# Altium PCB FlightController.PcbDoc
Units mil, origin at the board's own origin, x right, y up, seen from the top; angles counter-clockwise.
Board outline 3138.03 x 2448.03 mil, 2 copper layers (Top Layer, Bottom Layer); 37 components, 47 nets, 187 pads, 24 vias.
Unrouted connection lines stored in the file: 2.
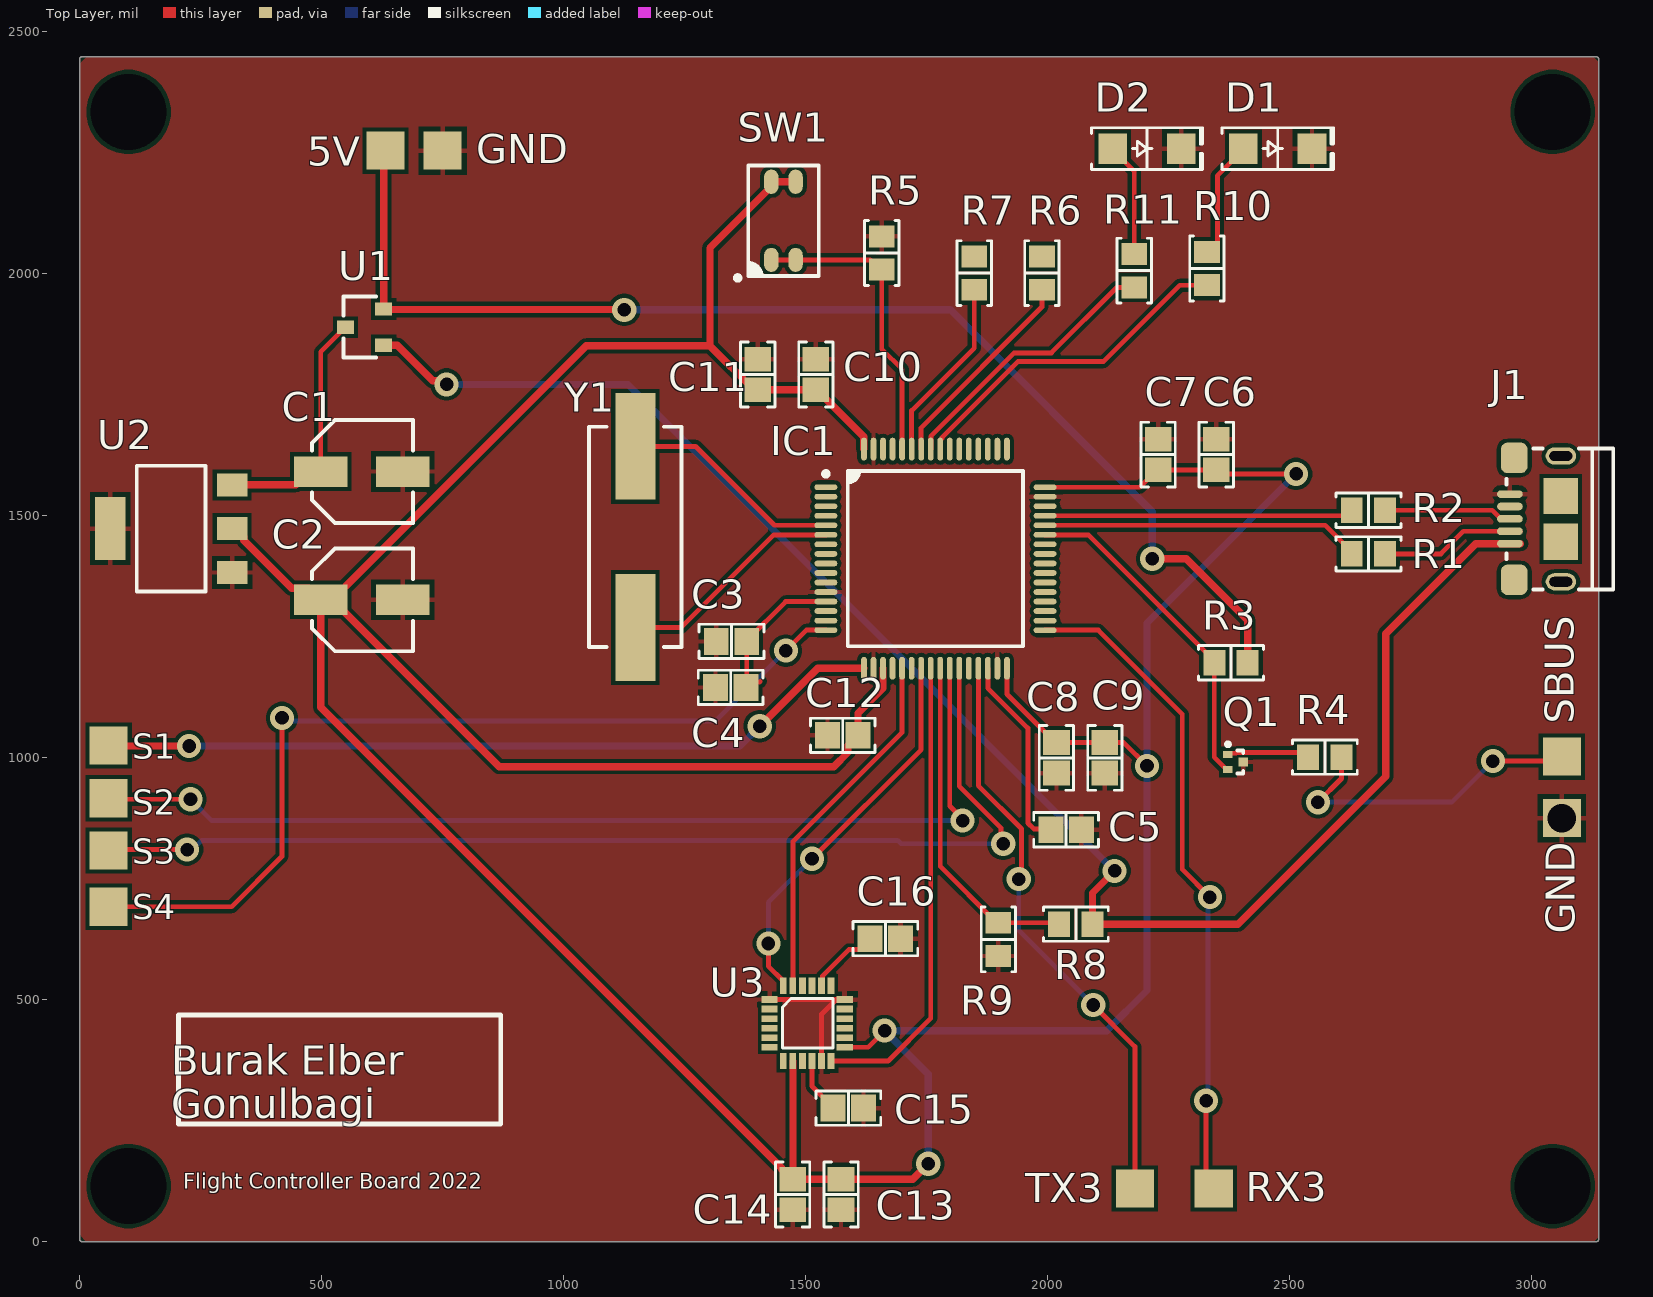
[diagram p0: Top Layer view]
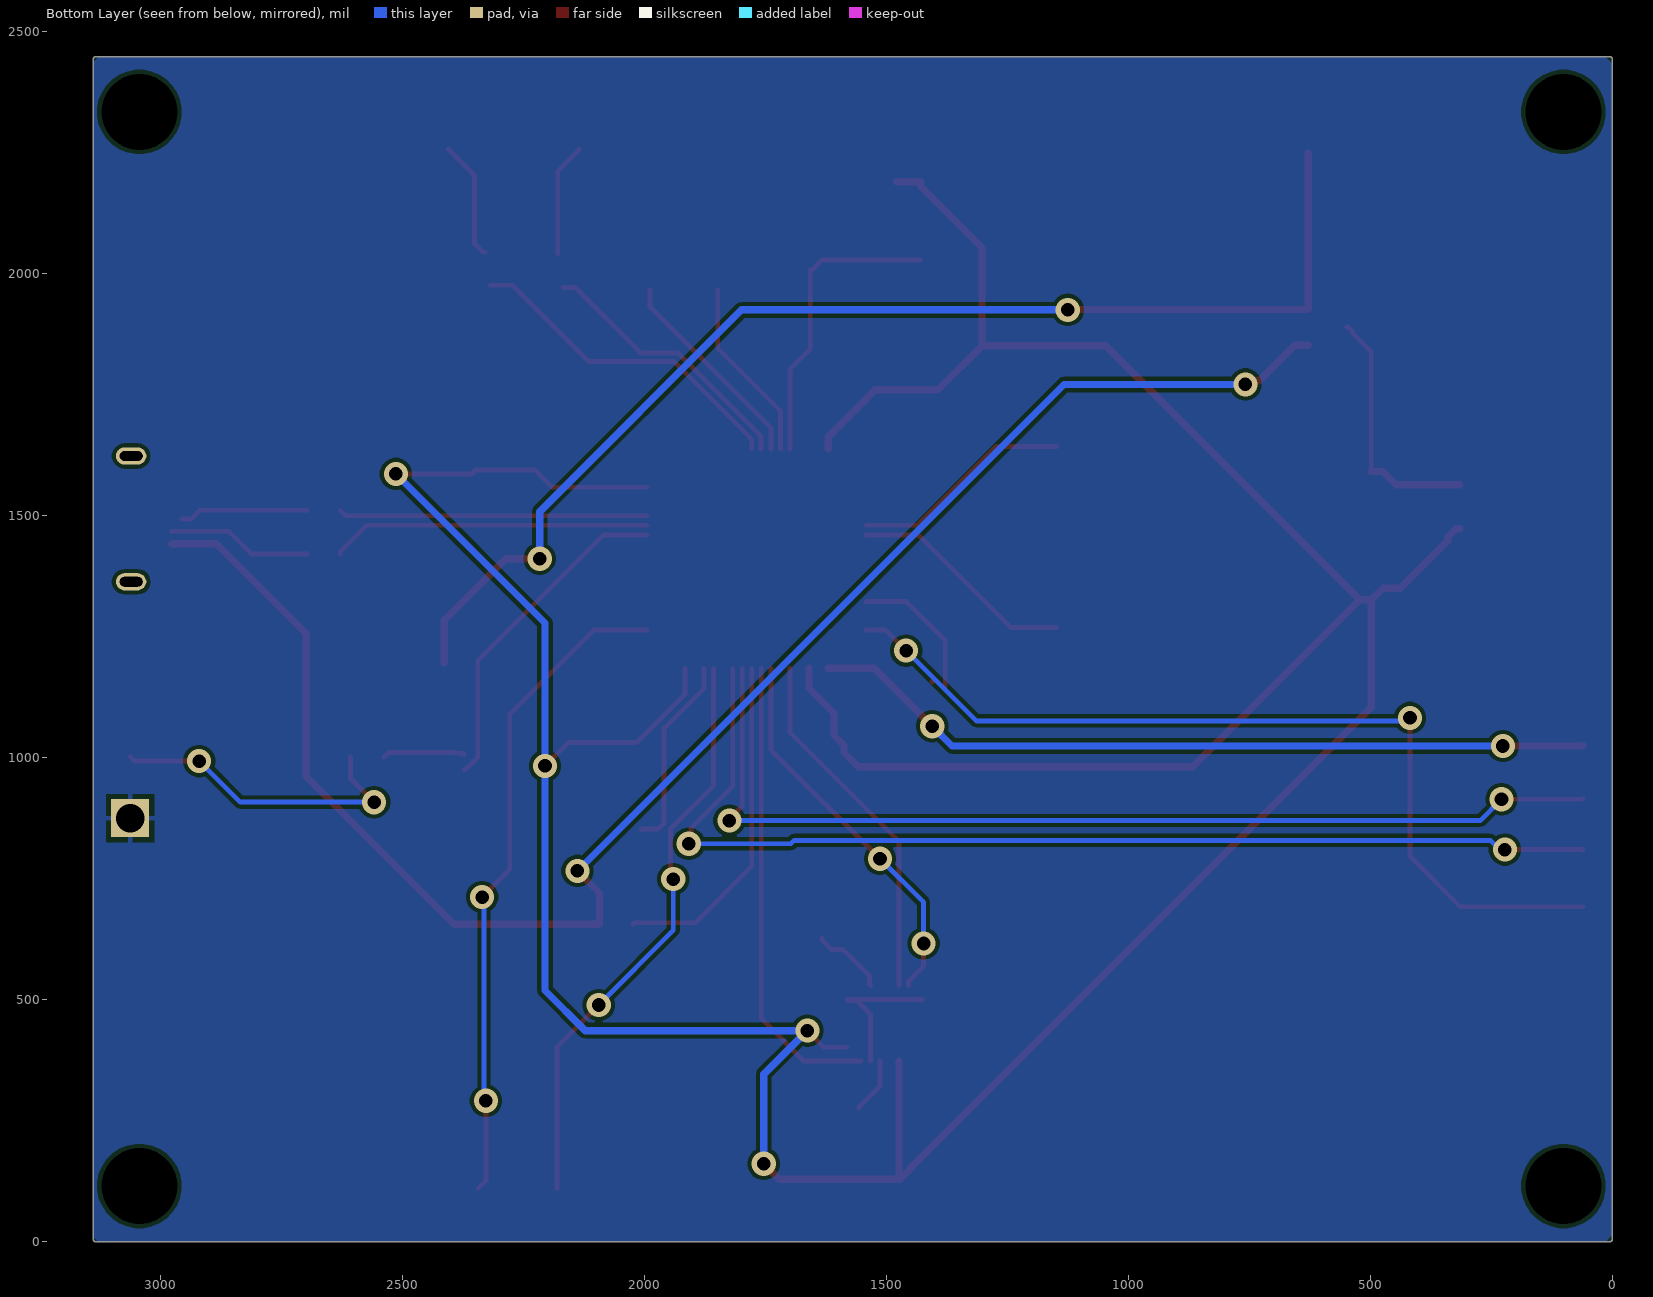
[diagram p1: Bottom Layer view, seen from below]
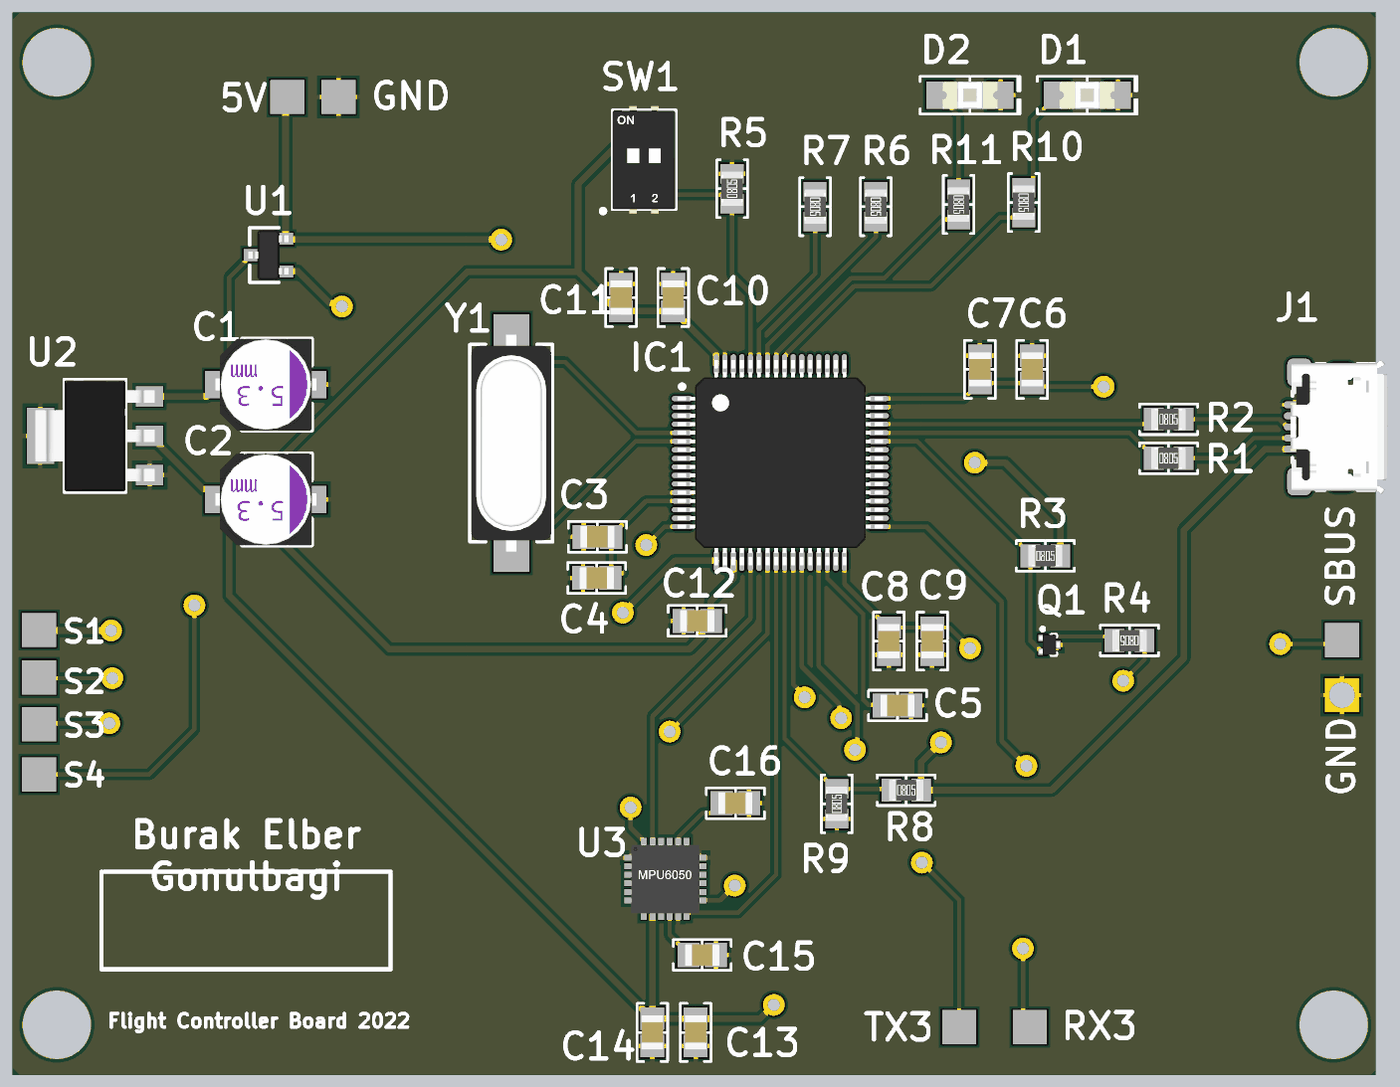
[diagram p2: 3D render of the assembled board from above, using the file's embedded part models]

## Layer stack, top to bottom
Top Solder: solder mask 0.4, Solder Resist, Dk 3.5
Top Layer: signal copper 1.4
Dielectric 1: dielectric 12.6, FR-4, Dk 4.8
Bottom Layer: signal copper 1.4
Bottom Solder: solder mask 0.4, Solder Resist, Dk 3.5

## Board outline
-0.01,5 ccw(c5,5) 5,-0.02 3133,-0.02 ccw(c3133,5) 3138.02,5 3138.01,2443 ccw(c3133,2443) 3133,2448.02 6,2448.02 ccw(c6,2443) 5.5,2447.99 ccw(c5,2443) -0.02,2443

## Design rules (kind name [scope] priority, off if disabled: settings)
Clearance [All] p1: gap=8 ignorepadtopadclearanceinfootprint=FALSE except(0: Arc-Hole Track-Hole SMDPad-Hole THPad-Hole Via-Hole Fill-Hole Poly-Hole Region-Hole Text-Hole; 5: Arc-SMDPad Track-SMDPad SMDPad-SMDPad)
PolygonConnect [All] p1: connectstyle=Relief reliefconductorwidth=10 reliefentries=4 polygonreliefangle="90 Angle" airgapwidth=10
RoutingVias [All] p1: holewidth=28 width=50 viastyle="Through Hole" minholewidth=28 minwidth=50 maxholewidth=28 maxwidth=50
SolderMaskExpansion [All] p1: expansion=4 istentingtop=FALSE
Width [All] p1: maxlimit=15 minlimit=10 preferedwidth=10 minimp=50.000000 maximp=50.000000 favimp=50.000000
30 further rules are at their usual default settings.

## Components (designator, comment, footprint, x,y, rotation, side; value= is the part's Value field where it differs from the comment)
C1 "10 µF" "CAP ALSMD POLY 5.3MM H5.8MM" 582.65,1591 r0 top
C2 "10 µF" "CAP ALSMD POLY 5.3MM H5.8MM" 582.65,1326 r0 top
C3 "1 µF" "CAP 0805_2012" 1346.5,1240 r0 top
C4 "0.1 µF" "CAP 0805_2012" 1345,1145 r0 top
C5 "0.1 µF" "CAP 0805_2012" 2038,851 r180 top
C6 "4.7 µF" "CAP 0805_2012" 2348,1626 r270 top
C7 "0.1 µF" "CAP 0805_2012" 2228,1626 r270 top
C8 "0.1 µF" "CAP 0805_2012" 2018,999.5 r90 top
C9 "0.1 µF" "CAP 0805_2012" 2118,999.5 r90 top
C10 "0.1 µF" "CAP 0805_2012" 1521,1791.5 r270 top
C11 "0.1 µF" "CAP 0805_2012" 1401,1791.5 r270 top
C12 "0.1 µF" "CAP 0805_2012" 1576.5,1046 r0 top
C13 "0.1 µF" "CAP 0805_2012" 1573,97.5 r90 top
C14 "10000pF" "CAP 0805_2012" 1473,97.5 r90 top
C15 "0.1 µF" "CAP 0805_2012" 1588,276 r180 top
C16 "2200 pF" "CAP 0805_2012" 1664.5,626 r0 top
D1 "Red" "LED 1206_3216 RED" 2475,2258 r0 top
D2 "Red" "LED 1206_3216 RED" 2205,2258 r0 top
IC1 "STM32F401RBT6TR" "ST LQFP-64 10X10MM" 1768,1411 r0 top
J1 "10118193-0001LF" "FCI USB 10118193-0001LF" 3058.09,1493.24 r270 top
Q1 "2SCR523MT2L" "ROHM SOT-723" 2388,991 r0 top
R1 "22 Ohms" "RES 0805_2012" 2662.45,1421 r0 top
R2 "22 Ohms" "RES 0805_2012" 2662.45,1511 r0 top
R3 "10 kOhms" "RES 0805_2012" 2378.55,1196 r0 top
R4 "4.7 kOhms" "RES 0805_2012" 2572.45,1001 r180 top
R5 "10 kOhms" "RES 0805_2012" 1657,2042.45 r90 top
R6 "10 kOhms" "RES 0805_2012" 1988,2001 r270 top
R7 "10 kOhms" "RES 0805_2012" 1848,2001 r270 top
R8 "10 kOhms" "RES 0805_2012" 2058,656 r0 top
R9 "10 kOhms" "RES 0805_2012" 1898,624.5 r90 top
R10 "1 kOhms" "RES 0805_2012" 2328.75,2010.45 r270 top
R11 "1 kOhms" "RES 0805_2012" 2178.75,2006 r270 top
SW1 "218-2LPSTR" "CTS 218-2LPJ" 1454,2109 r90 top
U1 "BAT54C" SOT-23 588.63,1889.4 r90 top
U2 "IC REG LDO 3.3V 1A SOT223" SOT223 189,1473 r90 top
U3 "GYRO SENSOR" QFN_24PINS 1503,451 r0 top
Y1 "8 MHz" "ABRACON ABLS" 1148,1456 r270 top

## Footprints (in the part's own frame and the unit in brackets; to place one, negate y for a bottom-side part, rotate by r counter-clockwise, add the part's x,y. Pads: shape width x height; smd on the part's side, far side on the other; paste and mask are expansions set on the pad)
"ABRACON ABLS" [mm] "Crystal, 2-Leads, Body 4.70x11.40mm, Pitch 8.80mm, IPC Medium Density"
  rect 5.6x2.1 smd: 1(-4.75,0) 2(4.75,0)
  silkscreen extent -5.77,-2.43 5.77,2.43, body extent -6.35,-2.35 6.35,2.35, height 4.2
"CAP 0805_2012" [mm] "Chip Capacitor, 2-Leads, Body 2.00x1.20mm, IPC Medium Density"
  rect 1.3x1.4 smd: 1(-0.8,0) 2(0.8,0)
  silkscreen extent -1.7,-0.9 1.7,0.9, body extent -1,-0.64 1,0.64, height 1.26
"CAP ALSMD POLY 5.3MM H5.8MM" [mm] "Aluminum Polymer Capacitor, Body 5.30x5.30x5.80mm, IPC Medium Density"
  rect 2.8x1.6 smd: 1(-2.15,0) 2(2.15,0)
  silkscreen extent -2.6,-2.7 2.7,2.7, body extent -2.95,-2.7 2.95,2.7, height 5.8
"CTS 218-2LPJ" [mm] "DIP, 2 POS, Body 3.71x6.05mm, Pitch 1.27mm, IPC Medium Density"
  oval 1.27x0.76 smd: 1(-2.05,0.635) 2(-2.05,-0.635) 3(2.05,-0.635) 4(2.05,0.635)
  silkscreen extent -3.12,-1.85 2.9,2.52, body extent -3.15,-1.86 3.15,1.85, height 2.71
"FCI USB 10118193-0001LF" [mm] "USB 2.0 Type B Micro"
  oval 0.4x1.35 smd: 1(1.3,-2.625) 2(0.65,-2.625) 3(0,-2.625) 4(-0.65,-2.625) 5(-1.3,-2.625)
  oval 0.9x1.6 hole 0.5 slot 1.2 at 90 deg: S(-3.3,0.05) S(3.3,0.05)
  rrect50% 1.6x1.4 smd: S(-3.2,-2.4) S(3.2,-2.4)
  rect 1.9x1.8 smd: S(-1.2,0.05) S(1.2,0.05)
  silkscreen extent -3.7,-2.8 3.7,2.8, body extent -3.93,-2.9 3.93,2.76, height 2.78
"LED 1206_3216 RED" [mm] "Chip Diode, 2-Leads, Body 3.13x1.55mm, IPC Medium Density"
  rect 1.5x1.6 smd: 1(-1.8,0) 2(1.8,0)
  silkscreen extent -2.92,-1.1 2.92,1.1, body extent -1.6,-0.8 1.6,0.8, height 0.9
QFN_24PINS [mm]
  rect 0.85x0.35 smd mask+0.05: 1(-1.975,1.25) 2(-1.975,0.75) 3(-1.975,0.25) 4(-1.975,-0.25) 5(-1.975,-0.75) 6(-1.975,-1.25) 13(1.975,-1.25) 14(1.975,-0.75) 15(1.975,-0.25) 16(1.975,0.25) 17(1.975,0.75) 18(1.975,1.25)
  rect 0.35x0.85 smd mask+0.05: 7(-1.25,-1.975) 8(-0.75,-1.975) 9(-0.25,-1.975) 10(0.25,-1.975) 11(0.75,-1.975) 12(1.25,-1.975) 19(1.25,1.975) 20(0.75,1.975) 21(0.25,1.975) 22(-0.25,1.975) 23(-0.75,1.975) 24(-1.25,1.975)
  silkscreen extent -1.3,-1.3 1.35,1.3, body extent -2.02,-2.02 2.02,2.02, height 0.88
"RES 0805_2012" [mm] "Chip Resistor, 2-Leads, Body 2.00x1.25mm, IPC Medium Density"
  rect 1.15x1.35 smd: 1(-0.875,0) 2(0.875,0)
  silkscreen extent -1.7,-0.9 1.7,0.9, body extent -1,-0.62 1,0.63, height 0.6
"ROHM SOT-723" [mm] "SOT-723, 3-Leads, Body 0.8x1.20mm, Pitch 0.40mm, IPC Medium Density"
  rect 0.5x0.37 smd: 1(-0.4,0.4) 3(-0.4,-0.4)
  rect 0.5x0.47 smd: 2(0.4,0)
  silkscreen extent -0.5,-0.6 0.4,1.02, body extent -0.6,-0.6 0.6,0.6, height 0.55
SOT223 [mm]
  rect 1.2x1.6 smd mask+0.05: 1(-2.3,-3.2) 2(0,-3.2) 3(2.3,-3.2)
  rect 3.3x1.6 smd mask+0.05: 1(0,3.2)
  silkscreen extent -3.3,-1.8 3.3,1.8, body extent -3.25,-3.48 3.25,3.48, height 1.65
SOT-23 [mm]
  rect 0.7x0.9 smd: 1(-0.95,-1) 2(0.95,-1) 3(0,1)
  silkscreen extent -1.6,-0.6 1.6,1.1, body extent -1.46,-1.17 1.46,1.17, height 1
"ST LQFP-64 10X10MM" [mm] "LQFP, 64-Leads, Body 10.00x10.00mm, Pitch 0.50mm, IPC Medium Density"
  oval 1.2x0.3 smd: 1(-5.75,3.75) 2(-5.75,3.25) 3(-5.75,2.75) 4(-5.75,2.25) 5(-5.75,1.75) 6(-5.75,1.25) 7(-5.75,0.75) 8(-5.75,0.25) 9(-5.75,-0.25) 10(-5.75,-0.75) 11(-5.75,-1.25) 12(-5.75,-1.75) 13(-5.75,-2.25) 14(-5.75,-2.75) 15(-5.75,-3.25) 16(-5.75,-3.75) 33(5.75,-3.75) 34(5.75,-3.25) 35(5.75,-2.75) 36(5.75,-2.25) 37(5.75,-1.75) 38(5.75,-1.25) 39(5.75,-0.75) 40(5.75,-0.25) 41(5.75,0.25) 42(5.75,0.75) 43(5.75,1.25) 44(5.75,1.75) 45(5.75,2.25) 46(5.75,2.75) 47(5.75,3.25) 48(5.75,3.75)
  oval 0.3x1.2 smd: 17(-3.75,-5.75) 18(-3.25,-5.75) 19(-2.75,-5.75) 20(-2.25,-5.75) 21(-1.75,-5.75) 22(-1.25,-5.75) 23(-0.75,-5.75) 24(-0.25,-5.75) 25(0.25,-5.75) 26(0.75,-5.75) 27(1.25,-5.75) 28(1.75,-5.75) 29(2.25,-5.75) 30(2.75,-5.75) 31(3.25,-5.75) 32(3.75,-5.75) 49(3.75,5.75) 50(3.25,5.75) 51(2.75,5.75) 52(2.25,5.75) 53(1.75,5.75) 54(1.25,5.75) 55(0.75,5.75) 56(0.25,5.75) 57(-0.25,5.75) 58(-0.75,5.75) 59(-1.25,5.75) 60(-1.75,5.75) 61(-2.25,5.75) 62(-2.75,5.75) 63(-3.25,5.75) 64(-3.75,5.75)
  silkscreen extent -5.87,-4.6 4.6,4.6, body extent -6.01,-6.01 6.01,6.01, height 1.6

## Part data
C1 C2: library part 875105359001, "CAP ALUM POLY 10UF 20% 16V SMD", Device Package="Radial, Can - SMD", ESR (Equivalent Series Resistance)=30mOhm, Lifetime @ Temp.="2000 Hrs @ 105°C", manufacturer="Würth Elektronik", Operating Temperature="-55°C ~ 105°C", Ripple Current @ High Frequency="2.2 A @ 100 kHz", Ripple Current @ Low Frequency="110 mA @ 120 Hz", Supplier Part Number 1=732-6416-1-ND, Tolerance=±20%, Voltage - Rated="16 V", Applications="General Purpose", Capacitance="10 µF", componentlink1description=Datasheet, componentlink1url=https://katalog.we-online.de/pbs/datasheet/875105359001.pdf, componentlink2description="DigiKey Link", componentlink2url=https://www.digikey.com/en/products/detail/würth-elektronik/875105359001/5147580, Height - Seated (Max)="0.228\" (5.80mm)", lastupdated="25.06.2022 14:19:37", Lifecycle Status=Active, Minimum Order=1, Mounting Type="Surface Mount", Package / Case="Radial, Can - SMD", packaging=TapeAndReel, Part Number=875105359001, Part Status=Active, partid=1907, price=0.28, series=WCAP-PSLP, Size / Dimension="0.197\" Dia (5.00mm)", Supplier 1=DigiKey, Surface Mount Land Size="0.209\" L x 0.209\" W (5.30mm x 5.30mm)", Type=Polymer
C3: library part C2012X8R1C105K125AB, "CAP CER 1UF 16V X8R 0805", Device Package="0805 (2012 Metric)", manufacturer="TDK Corporation", Operating Temperature="-55°C ~ 150°C", Supplier Part Number 1=445-8829-1-ND, Temperature Coefficient=X8R, Tolerance=±10%, Voltage - Rated=16V, Applications="General Purpose", Capacitance="1 µF", componentlink1description=Datasheet, componentlink1url=https://product.tdk.com/info/en/catalog/datasheets/mlcc_commercial_hightemp_en.pdf?ref_disty=digikey, componentlink2description="DigiKey Link", componentlink2url=https://www.digikey.com/en/products/detail/tdk-corporation/C2012X8R1C105K125AB/3248171, Features="High Temperature", lastupdated="25.03.2022 19:02:17", Lifecycle Status=Active, Minimum Order=1, Mounting Type="Surface Mount, MLCC", Package / Case="0805 (2012 Metric)", packaging=TapeAndReel, Part Number=C2012X8R1C105K125AB, Part Status=Active, partid=2997, price=0.08, series=C, Size / Dimension="0.079\" L x 0.049\" W (2.00mm x 1.25mm)", Supplier 1=DigiKey, Thickness (Max)="0.057\" (1.45mm)"
C4 C5 C7 C8 C9 C10 C11 C12: library part 160R15W104KV4T, "CAP CER 0.1UF 16V X7R 0805", Device Package="0805 (2012 Metric)", manufacturer="Johanson Dielectrics Inc.", Operating Temperature="-55°C ~ 125°C", Supplier Part Number 1=709-1183-1-ND, Temperature Coefficient=X7R, Tolerance=±10%, Voltage - Rated=16V, Applications="General Purpose", Capacitance="0.1 µF", componentlink1description=Datasheet, componentlink1url=https://www.johansondielectrics.com/downloads/catalog/johanson-dielectrics-product-catalog.pdf, componentlink2description="DigiKey Link", componentlink2url=https://www.digikey.com/en/products/detail/johanson-dielectrics-inc/160R15W104KV4T/1859428, lastupdated="25.03.2022 19:02:00", Lifecycle Status=Active, Minimum Order=1, Mounting Type="Surface Mount, MLCC", Package / Case="0805 (2012 Metric)", packaging=TapeAndReel, Part Number=160R15W104KV4T, Part Status=Active, partid=9125, price=0.03, series=-, Size / Dimension="0.080\" L x 0.050\" W (2.03mm x 1.27mm)", Supplier 1=DigiKey, Thickness (Max)="0.050\" (1.27mm)"
C6: library part CL21A475KPFNNNE, "CAP CER 4.7UF 10V X5R 0805", Device Package="0805 (2012 Metric)", manufacturer="Samsung Electro-Mechanics", Operating Temperature="-55°C ~ 85°C", Supplier Part Number 1=1276-1259-1-ND, Temperature Coefficient=X5R, Tolerance=±10%, Voltage - Rated=10V, Applications="General Purpose", Capacitance="4.7 µF", componentlink1description=Datasheet, componentlink1url=http://www.samsungsem.com/kr/support/product-search/mlcc/CL21A475KPFNNNE.jsp, componentlink2description="DigiKey Link", componentlink2url=https://www.digikey.com/en/products/detail/samsung-electro-mechanics/CL21A475KPFNNNE/3886917, lastupdated="25.03.2022 19:02:16", Lifecycle Status=Active, Minimum Order=1, Mounting Type="Surface Mount, MLCC", Package / Case="0805 (2012 Metric)", packaging=TapeAndReel, Part Number=CL21A475KPFNNNE, Part Status=Active, partid=3193, price=0.01, series=CL, Size / Dimension="0.079\" L x 0.049\" W (2.00mm x 1.25mm)", Supplier 1=DigiKey, Thickness (Max)="0.053\" (1.35mm)"
C13 C15: library part 0805B104K160CT, "CAP CER 0.1UF 16V X7R 0805", Device Package="0805 (2012 Metric)", manufacturer="Walsin Technology Corporation", Operating Temperature="-55°C ~ 125°C", Supplier Part Number 1=1292-1565-1-ND, Temperature Coefficient=X7R, Tolerance=±10%, Voltage - Rated=16V, Applications="General Purpose", Capacitance="0.1 µF", componentlink1description=Datasheet, componentlink1url=http://www.passivecomponent.com/wp-content/uploads/2018/10/MLCC.pdf, componentlink2description="DigiKey Link", componentlink2url=https://www.digikey.com/en/products/detail/walsin-technology-corporation/0805B104K160CT/9355062, lastupdated="2.04.2022 05:58:35", Lifecycle Status=Active, Minimum Order=1, Mounting Type="Surface Mount, MLCC", Package / Case="0805 (2012 Metric)", packaging=TapeAndReel, Part Number=0805B104K160CT, Part Status=Active, partid=4882, price=0.01, series=-, Size / Dimension="0.079\" L x 0.049\" W (2.00mm x 1.25mm)", Supplier 1=DigiKey, Thickness (Max)="0.035\" (0.90mm)"
C14: library part 0805YC103KAT2A, "CAP CER 10000PF 16V X7R 0805", Device Package="0805 (2012 Metric)", manufacturer="AVX Corporation", Operating Temperature="-55°C ~ 125°C", Supplier Part Number 1=478-12793-1-ND, Temperature Coefficient=X7R, Tolerance=±10%, Voltage - Rated=16V, Applications="General Purpose", Capacitance=10000pF, componentlink1description=Datasheet, componentlink1url=http://datasheets.avx.com/X7RDielectric.pdf, componentlink2description="DigiKey Link", componentlink2url=http://digikey.com/product-detail/en/avx-corporation/0805YC103KAT2A/478-12793-1-ND/9949333, lastupdated="2.09.2020 01:04:37", Lifecycle Status=Active, Minimum Order=1, Mounting Type="Surface Mount, MLCC", Package / Case="0805 (2012 Metric)", packaging=TapeAndReel, Part Number=0805YC103KAT2A, Part Status=Active, partid=5374, price=0.03, series=-, Size / Dimension="0.079\" L x 0.049\" W (2.01mm x 1.25mm)", Supplier 1=DigiKey, Thickness (Max)="0.037\" (0.94mm)"
C16: library part 885012207009, "CAP CER 2200PF 10V X7R 0805", Device Package="0805 (2012 Metric)", manufacturer="Würth Elektronik", Operating Temperature="-55°C ~ 125°C", Supplier Part Number 1=732-8019-1-ND, Temperature Coefficient=X7R, Tolerance=±10%, Voltage - Rated=10V, Applications="General Purpose", Capacitance="2200 pF", componentlink1description=Datasheet, componentlink1url=https://katalog.we-online.de/pbs/datasheet/885012207009.pdf, componentlink2description="DigiKey Link", componentlink2url=https://www.digikey.com/en/products/detail/würth-elektronik/885012207009/5453874, lastupdated="2.04.2022 05:58:23", Lifecycle Status=Active, Minimum Order=1, Mounting Type="Surface Mount, MLCC", Package / Case="0805 (2012 Metric)", packaging=TapeAndReel, Part Number=885012207009, Part Status=Active, partid=9414, price=0.03, series=WCAP-CSGP, Size / Dimension="0.079\" L x 0.049\" W (2.00mm x 1.25mm)", Supplier 1=DigiKey, Thickness (Max)="0.035\" (0.90mm)"
D1 D2: library part 5973111402F, "LED RED CLEAR 1206 SMD", Current - Test=20mA, Device Package="1206 (3216 Metric)", Lens Color=Colorless, manufacturer=Dialight, Millicandela Rating=33.6mcd, Supplier Device Package=1206, Supplier Part Number 1=350-2880-ND, Voltage - Forward (Vf) (Typ)=1.7V, Color=Red, componentlink1description=Datasheet, componentlink1url=http://www.dialightsignalsandcomponents.com/Assets/Brochures_And_Catalogs/Indication/SMT_selector_guide.pdf, componentlink2description="DigiKey Link", componentlink2url=https://www.digikey.com/en/products/detail/dialight/5973111402F/2432500, Configuration=Standard, Height (Max)=1.51mm, lastupdated="25.03.2022 19:41:37", Lens Style="Round with Flat Top", Lens Transparency=Clear, Lifecycle Status=Active, Minimum Order=1, Mounting Type="Surface Mount", Package / Case="1206 (3216 Metric)", packaging=Strip, Part Number=5973111402F, Part Status=Active, partid=1070, price=0.27, series=597, Size / Dimension="3.00mm L x 1.50mm W", Supplier 1=DigiKey, Viewing Angle=70°, Wavelength - Dominant=647nm, Wavelength - Peak=660nm
IC1: "IC MCU 32BIT 128KB FLASH 64LQFP", Device Package=64-LQFP, manufacturer=STMicroelectronics, Operating Temperature="-40°C ~ 85°C (TA)", Supplier Device Package="64-LQFP (10x10)", Supplier Part Number 1=497-18782-2-ND, Voltage - Supply (Vcc/Vdd)="1.7V ~ 3.6V", componentlink1description=Datasheet, componentlink1url=http://www.st.com/content/ccc/resource/technical/document/datasheet/9e/50/b1/5a/5f/ae/4d/c1/DM00086815.pdf/files/DM00086815.pdf/jcr:content/translations/en.DM00086815.pdf, componentlink2description="DigiKey Link", componentlink2url=//digikey.com/product-detail/en/stmicroelectronics/STM32F401RBT6TR/497-18782-2-ND/5268280, Connectivity="I²C, IrDA, LINbus, SDIO, SPI, UART/USART, USB OTG", Core Processor="ARM® Cortex®-M4", Core Size=32-Bit, Data Converters="A/D 16x12b", lastupdated="4.12.2019 05:53:46", Lifecycle Status=0, Minimum Order=1, Mounting Type="Surface Mount", Number of I/O=50, Oscillator Type=Internal, Package / Case=64-LQFP, packaging=TapeAndReel, Part Number=STM32F401RBT6TR, Part Status=Active, partid=114, Peripherals="Brown-out Detect/Reset, DMA, I²S, POR, PWM, WDT", price=2.54, Program Memory Size="128KB (128K x 8)", Program Memory Type=FLASH, RAM Size="64K x 8", series=STM32F4, Speed=84MHz, Supplier 1=DigiKey
J1: "CONN RCPT USB2.0 MICRO B SMD R/A", Current Rating (Amps)="1.8A per Contact", manufacturer="Amphenol ICC (FCI)", Operating Temperature="-30°C ~ 80°C", Supplier Part Number 1=609-4616-2-ND, Voltage - Rated=100VAC, componentlink1description=Datasheet, componentlink1url=https://cdn.amphenol-icc.com/media/wysiwyg/files/documentation/datasheet/inputoutput/io_usb_micro.pdf, componentlink2description="DigiKey Link", componentlink2url=//digikey.com/product-detail/en/amphenol-icc-fci/10118193-0001LF/609-4616-2-ND/2785388, Connector Type="USB - micro B", Features="Solder Retention", Gender=Receptacle, lastupdated="9.12.2019 20:51:28", Lifecycle Status=0, Mating Cycles=10000, Minimum Order=1, Mounting Feature=Horizontal, Mounting Type="Surface Mount, Right Angle; Through Hole", Number of Contacts=5, Number of Ports=1, packaging=TapeAndReel, Part Number=10118193-0001LF, Part Status=Active, price=0.21, series=-, Shielding=Shielded, Specifications="USB 2.0", Supplier 1=DigiKey, Termination=Solder
Q1: "TRANS NPN 50V 0.1A VMT3", Current - Collector (Ic) (Max)="100 mA", Current - Collector Cutoff (Max)="100nA (ICBO)", DC Current Gain (hFE) (Min) @ Ic, Vce="120 @ 1mA, 6V", Frequency - Transition=350MHz, manufacturer="Rohm Semiconductor", Operating Temperature="150°C (TJ)", Package / Case=SOT-723, Power - Max="150 mW", Supplier Device Package=VMT3, Supplier Part Number 1=2SCR523MT2LCT-ND, Voltage - Collector Emitter Breakdown (Max)="50 V", componentlink1description=Datasheet, componentlink1url=http://rohmfs.rohm.com/en/products/databook/datasheet/discrete/transistor/bipolar/2scr523mt2l-e.pdf, componentlink2description="DigiKey Link", componentlink2url=https://www.digikey.com/en/products/detail/rohm-semiconductor/2SCR523MT2L/5019055, lastupdated="29.06.2022 14:53:08", Lifecycle Status=Active, Minimum Order=1, Mounting Type="Surface Mount", packaging=TapeAndReel, Part Number=2SCR523MT2L, Part Status=Active, partid=1, price=0.03, series=-, Supplier 1=DigiKey, Transistor Type=NPN, Vce Saturation (Max) @ Ib, Ic="300mV @ 5mA, 50mA"
R1 R2: library part CPF0805B22RE1, "RES SMD 22 OHM 0.1% 1/10W 0805", Device Package="0805 (2012 Metric)", manufacturer="TE Connectivity Passive Product", Operating Temperature="-55°C ~ 155°C", Power (Watts)="0.1W, 1/10W", Supplier Device Package=0805, Supplier Part Number 1=A103179CT-ND, Temperature Coefficient=±25ppm/°C, Tolerance=±0.1%, componentlink1description=Datasheet, componentlink1url=https://www.te.com/commerce/DocumentDelivery/DDEController?Action=srchrtrv&DocNm=1773200&DocType=DS&DocLang=English, componentlink2description="DigiKey Link", componentlink2url=https://www.digikey.com/en/products/detail/te-connectivity-passive-product/CPF0805B22RE1/2381993, Composition="Thin Film", Height - Seated (Max)="0.026\" (0.65mm)", lastupdated="2.04.2022 06:26:45", Lifecycle Status=Active, Minimum Order=1, Number of Terminations=2, Package / Case="0805 (2012 Metric)", packaging=TapeAndReel, Part Number=CPF0805B22RE1, Part Status=Active, partid=28451, price=0.13, Resistance="22 Ohms", series="CPF, Neohm", Size / Dimension="0.079\" L x 0.049\" W (2.00mm x 1.25mm)", Supplier 1=DigiKey
R3 R5 R6 R7 R8 R9: library part RNCS0805BKE10K0, "RES 10K OHM 0.1% 1/10W 0805", Device Package="0805 (2012 Metric)", manufacturer="Stackpole Electronics Inc", Operating Temperature="-55°C ~ 155°C", Power (Watts)="0.1W, 1/10W", Ratings=AEC-Q200, Supplier Device Package=0805, Supplier Part Number 1=RNCS0805BKE10K0CT-ND, Temperature Coefficient=±25ppm/°C, Tolerance=±0.1%, componentlink1description=Datasheet, componentlink1url=https://www.seielect.com/catalog/sei-rncs_rnch.pdf, componentlink2description="DigiKey Link", componentlink2url=https://www.digikey.com/en/products/detail/stackpole-electronics-inc/RNCS0805BKE10K0/1800067, Composition="Thin Film", Features="Anti-Corrosive, Automotive AEC-Q200, Moisture Resistant", Height - Seated (Max)="0.026\" (0.65mm)", lastupdated="25.03.2022 19:30:13", Lifecycle Status=Active, Minimum Order=1, Number of Terminations=2, Package / Case="0805 (2012 Metric)", packaging=TapeAndReel, Part Number=RNCS0805BKE10K0, Part Status=Active, partid=27713, price=0.09, Resistance="10 kOhms", series=RNCS, Size / Dimension="0.079\" L x 0.049\" W (2.00mm x 1.25mm)", Supplier 1=DigiKey
R4: library part RCS08054K70JNEA, "RES SMD 4.7K OHM 5% 0.4W 0805", Device Package="0805 (2012 Metric)", manufacturer="Vishay Dale", Operating Temperature="-55°C ~ 155°C", Power (Watts)="0.4W, 2/5W", Ratings=AEC-Q200, Supplier Device Package=0805, Supplier Part Number 1=541-2866-1-ND, Temperature Coefficient=±200ppm/°C, Tolerance=±5%, componentlink1description=Datasheet, componentlink1url=http://www.vishay.com/docs/20065/rcse3.pdf, componentlink2description="DigiKey Link", componentlink2url=https://www.digikey.com/en/products/detail/vishay-dale/RCS08054K70JNEA/5867012, Composition="Thick Film", Features="Automotive AEC-Q200, Pulse Withstanding", Height - Seated (Max)="0.020\" (0.50mm)", lastupdated="25.03.2022 19:30:13", Lifecycle Status=Active, Minimum Order=1, Number of Terminations=2, Package / Case="0805 (2012 Metric)", packaging=TapeAndReel, Part Number=RCS08054K70JNEA, Part Status=Active, partid=27839, price=0.02, Resistance="4.7 kOhms", series="RCS e3", Size / Dimension="0.079\" L x 0.049\" W (2.00mm x 1.25mm)", Supplier 1=DigiKey
R10 R11: library part RNCS0805BKE1K00, "RES 1K OHM 0.1% 1/10W 0805", Device Package="0805 (2012 Metric)", manufacturer="Stackpole Electronics Inc", Operating Temperature="-55°C ~ 155°C", Power (Watts)="0.1W, 1/10W", Ratings=AEC-Q200, Supplier Device Package=0805, Supplier Part Number 1=RNCS0805BKE1K00CT-ND, Temperature Coefficient=±25ppm/°C, Tolerance=±0.1%, componentlink1description=Datasheet, componentlink1url=https://www.seielect.com/catalog/sei-rncs_rnch.pdf, componentlink2description="DigiKey Link", componentlink2url=https://www.digikey.com/en/products/detail/stackpole-electronics-inc/RNCS0805BKE1K00/1800073, Composition="Thin Film", Features="Anti-Corrosive, Automotive AEC-Q200, Moisture Resistant", Height - Seated (Max)="0.026\" (0.65mm)", lastupdated="25.03.2022 19:30:13", Lifecycle Status=Active, Minimum Order=1, Number of Terminations=2, Package / Case="0805 (2012 Metric)", packaging=TapeAndReel, Part Number=RNCS0805BKE1K00, Part Status=Active, partid=27715, price=0.09, Resistance="1 kOhms", series=RNCS, Size / Dimension="0.079\" L x 0.049\" W (2.00mm x 1.25mm)", Supplier 1=DigiKey
SW1: "SWITCH SLIDE DIP SPST 25MA 24V", Current Rating (Amps)=25mA, manufacturer="CTS Electrocomponents", Operating Temperature="-55°C ~ 85°C", Supplier Part Number 1=CT3108CT-ND, Voltage Rating=24VDC, Actuator Level="Flush, Recessed", Actuator Type="Slide (Standard)", Circuit=SPST, componentlink1description=Datasheet, componentlink1url=https://www.ctscorp.com/wp-content/uploads/218.pdf, componentlink2description="DigiKey Link", componentlink2url=http://digikey.com/product-detail/en/cts-electrocomponents/218-2LPSTR/CT3108CT-ND/5875762, Contact Finish=Gold, Contact Material="Beryllium Copper", Features="Epoxy Sealed Terminals, Tape Seal", Height Above Board="0.104\" (2.65mm)", lastupdated="4.01.2020 18:51:31", Lifecycle Status=Active, Minimum Order=1, Mounting Type="Surface Mount", Number of Positions=2, packaging=ReReel, Part Number=218-2LPSTR, Part Status=Active, partid=8, Pitch="0.050\" (1.27mm), Half", price=0.00, series=218, Supplier 1=DigiKey, Termination Style="Gull Wing", Washable=Yes
U1: "Rectifier Diode Small Signal Schottky 30V 0.2A 5ns Automotive 3-Pin SOT-23 T/R", Capacitance=10pF, Case/Package=SOT-23-3, Current Rating=200A, Forward Current=200mA, Forward Voltage=800mV, manufacturer="NXP Semiconductors", Max Forward Surge Current (Ifsm)=600mA, Max Operating Temperature=150°C, Max Repetitive Reverse Voltage (Vrrm)=30V, Min Operating Temperature=-55°C, Supplier Part Number 1=BAT54CFSCT-ND, Category="Schottky Diodes", componentlink1description=http://www.farnell.com/datasheets/2304092.pdf?src-supplier=Farnell, componentlink1url=http://www.farnell.com/datasheets/2304092.pdf?src-supplier=Farnell, componentlink2description=https://www.distrelec.biz/Web/Downloads/_t/ds/bat54-series_eng_tds.pdf?mime=application%2Fpdf&src-supplier=Distrelec, componentlink2url=https://www.distrelec.biz/Web/Downloads/_t/ds/bat54-series_eng_tds.pdf?mime=application%2Fpdf&src-supplier=Distrelec, ComponentLink3Description=https://media.digikey.com/pdf/Data%20Sheets/ON%20Semiconductor%20PDFs/BAT54(A,C,S).pdf?src-supplier=Digi-Key, ComponentLink3URL=https://media.digikey.com/pdf/Data%20Sheets/ON%20Semiconductor%20PDFs/BAT54(A,C,S).pdf?src-supplier=Digi-Key, Designed by=Burak, Element Configuration="Common Cathode", Lead Free="Lead Free", Manufacturer Part Number=BAT54C, Number of Pins=3, packaging="Tape and Reel", REACH SVHC="No SVHC", Reverse Recovery Time=5ns, RoHS=Yes, RoHS Compliant=Yes, Supplier 1=Digi-Key, Termination=SMD/SMT, Voltage=30V, Voltage Rating (DC)=30V
U2: library part NCP1117ST33T3G, Case/Package=SOT-223, Dropout Voltage=1.07V, manufacturer="ON Semiconductor", Max Operating Temperature=125°C, Max Output Current=1A, Max Output Voltage=3.3V, Max Supply Voltage=15V, Max Input Voltage=20V, Min Operating Temperature=0°C, Min Supply Voltage=4.75V, Min Input Voltage=3.5V, Output Voltage Accuracy=1%, Package Quantity=1, Quiescent Current=10mA, Reference Voltage=1.25V, Supplier Part Number 1=NCP1117ST33T3GOSCT-ND, Input Bias Current=6mA, Accuracy=1%, Category="Voltage Regulators - Linear", componentlink1description=https://datasheet.ciiva.com/22697/1726422-22697602.pdf?src-supplier=Element14, componentlink1url=https://datasheet.ciiva.com/22697/1726422-22697602.pdf?src-supplier=Element14, componentlink2description=https://datasheet.ciiva.com/3224/ncp1117-d-3224144.pdf?src-supplier=Avnet, componentlink2url=https://datasheet.ciiva.com/3224/ncp1117-d-3224144.pdf?src-supplier=Avnet, ComponentLink3Description=https://datasheet.ciiva.com/15111/getdatasheetpartid-82718-15111483.pdf?src-supplier=Verical, ComponentLink3URL=https://datasheet.ciiva.com/15111/getdatasheetpartid-82718-15111483.pdf?src-supplier=Verical, ComponentLink4Description=https://datasheet.ciiva.com/8073/1726422-8073735.pdf?src-supplier=Element14, ComponentLink4URL=https://datasheet.ciiva.com/8073/1726422-8073735.pdf?src-supplier=Element14, ComponentLink5Description=https://datasheet.ciiva.com/28483/1748260-28483307.pdf?src-supplier=Element14, ComponentLink5URL=https://datasheet.ciiva.com/28483/1748260-28483307.pdf?src-supplier=Element14, ComponentLink6Description=https://datasheet.ciiva.com/16382/ncp1117-d-16382636.pdf?src-supplier=Future+Electronics, ComponentLink6URL=https://datasheet.ciiva.com/16382/ncp1117-d-16382636.pdf?src-supplier=Future+Electronics, ComponentLink7Description=https://datasheet.ciiva.com/8233/ncp1117-d-8233589.pdf?src-supplier=Avnet, ComponentLink7URL=https://datasheet.ciiva.com/8233/ncp1117-d-8233589.pdf?src-supplier=Avnet, ComponentLink8Description=https://datasheet.ciiva.com/2042/ncp1117-d-2042028.pdf?src-supplier=Digi-Key, ComponentLink8URL=https://datasheet.ciiva.com/2042/ncp1117-d-2042028.pdf?src-supplier=Digi-Key, ComponentLink9Description=https://datasheet.ciiva.com/2042/ncp1117-d-2042029.pdf?src-supplier=Digi-Key, ComponentLink9URL=https://datasheet.ciiva.com/2042/ncp1117-d-2042029.pdf?src-supplier=Digi-Key, ComponentLink10Description=https://datasheet.ciiva.com/2042/ncp1117-d-2042027.pdf?src-supplier=Digi-Key, ComponentLink10URL=https://datasheet.ciiva.com/2042/ncp1117-d-2042027.pdf?src-supplier=Digi-Key, Contact Plating=Tin,Matte, Designed by=Burak, Halogen Free="Halogen Free", Height=1.69mm, Lead Free="Lead Free", Length=6.7mm, Manufacturer Part Number=NCP1117ST33T3G, Min Current Limit=1A, Min Output Voltage=3.3V, Mount="Surface Mount", Nominal Output Voltage=3.3V, Number of Outputs=1, Number of Pins=3, Number of Regulators=1, Output Current=1A, Output Type=Fixed, Output Voltage=3.3V, packaging="Tape and Reel", Polarity=Positive, Pricing 1="1=0,67000, 10=0,57500, 25=0,53680, 100=0,42950, 250=0,39880, 500=0,33744, 1000=0,26075 (USD)", Radiation Hardening=No, REACH SVHC="No SVHC", RoHS=Yes, RoHS Compliant=Yes, Stock 1=11566, Supplier 1=Digi-Key, Termination=SMD/SMT, Width=3.7mm
U3: library part MPU-6050, "IMU ACCEL/GYRO 3-AXIS I2C 24QFN", Case/Package=QFN, manufacturer="TDK InvenSense", Max Operating Temperature=85°C, Min Operating Temperature=-40°C, Supplier Part Number 1=1428-1007-1-ND, Category="Inertial Measurement Units (IMUs)", componentlink1description=https://datasheet.ciiva.com/1513/1788002-1513632.pdf?src-supplier=Element14, componentlink1url=https://datasheet.ciiva.com/1513/1788002-1513632.pdf?src-supplier=Element14, componentlink2description=https://datasheet.ciiva.com/22731/1788002-22731434.pdf?src-supplier=Element14, componentlink2url=https://datasheet.ciiva.com/22731/1788002-22731434.pdf?src-supplier=Element14, Designed by=Burak, Manufacturer Part Number=MPU-6050, Mount="Surface Mount", Output Type=I2C, packaging="Tape and Reel", Pricing 1="1=9,11000, 5=7,99200, 10=7,19300, 25=6,39400, 50=5,91440, 100=5,11520, 500=4,79550, 1000=4,47580 (USD)", RoHS=Yes, RoHS Compliant=Yes, Sensor Type="Accelerometer,Gyroscope,3 Axis", series=-, Supplier 1=Digi-Key
Y1: library part ABLS-8.000MHZ-SD7Y-T, "CRYSTAL 8.0000MHZ 18PF SMD", ESR (Equivalent Series Resistance)="80 Ohms", Frequency Stability=±30ppm, Frequency Tolerance=±15ppm, Load Capacitance=18pF, manufacturer="Abracon LLC", Operating Mode=Fundamental, Operating Temperature="-40°C ~ 85°C", Package / Case=HC-49/US, Supplier Part Number 1=535-14365-2-ND, componentlink1description=Datasheet, componentlink1url=https://abracon.com/Resonators/abls.pdf, componentlink2description="DigiKey Link", componentlink2url=https://www.digikey.com/en/products/detail/abracon-llc/ABLS-8-000MHZ-SD7Y-T/8581989, Frequency="8 MHz", Height - Seated (Max)="0.165\" (4.20mm)", lastupdated="2.04.2022 06:38:02", Lifecycle Status=Active, Minimum Order=1, Mounting Type="Surface Mount", packaging=CutTape, Part Number=ABLS-8.000MHZ-SD7Y-T, Part Status=Active, partid=25, price=0.27, series=ABLS, Size / Dimension="0.449\" L x 0.185\" W (11.40mm x 4.70mm)", Supplier 1=DigiKey, Type="MHz Crystal"

## Free pads (board coordinates)
  rect 78.74x78.74 smd: 2(632,2254) 2(750,2254) 3(60,1025) 4(60,916) 5(60,808) 6(60,692) 7(2180,110) 8(2343,110) 8(3062,1002)
  rect 78.74x78.74 hole 59.06: 8(3062,875)
  round 0 hole 157.48: 9(3043,2334) 10(101,2334) 11(101,115) 12(3043,115)

## Via types
v1: diameter 50, hole 28, Top Layer to Bottom Layer, 24 vias

## Nets (pads, with @x,y where several pads share a name; then routed paths per layer and width w, separated by ;. In a path a pad name is that pad's centre, name@x,y a point inside that pad or via, vN(x,y) a via of type N, cw(c..) or ccw(c..) an arc to the next point about the centre after c; other vN are vias at no path point)
5V_USB: J1.1 R8.2 U1.1 | length 3471.2
  Top Layer w15: U1.1 656.29,1852 729.64,1778.65 750.35,1778.65 v1(758,1771) ; v1(2138,766) 2092.45,720.45 R8.2 2393,656 2698,961 2698,1256 2884.06,1442.06 J1.1@2976.58,1442.06
  Bottom Layer w15: v1(758,1771) 1133,1771 v1(2138,766)
+3V3: C2.1 C6.2 C7.2 C8.2 C9.2 C10.2 C11.2 C12.2 C13.2 C14.2 IC1.19 IC1.32 IC1.48 IC1.64 SW1.3 SW1.4 U2.2 U3.8 U3.13 | length 8818.4
  Top Layer w10: U3.13 1628.79,401.79 v1(1663,436) ; IC1.32 1915.64,1131.39 2016.03,1031 C8.2 2157,1031 v1(2205,983) ; IC1.48 2190.17,1558.64 2226.03,1594.5 C7.2 C6.2 2356.5,1586 v1(2513,1586)
  Top Layer w15: U2.2 322.86,1473 338.98,1456.88 338.98,1449 437.99,1350 474,1350 C2.1 ; U3.8 1473.47,129.46 C14.2 ; SW1.3 SW1.4 1429,2179.67 1302,2052.67 1302,1851 ; IC1.64 1620.02,1637.72 1620.02,1662.95 1522.97,1760 C10.2 C11.2 1393,1760 1302,1851 ; IC1.19 1659.73,1143.35 1608,1091.62 C12.2 1587.41,1025.41 1587.41,1010.41 1558,981 866.62,981 C2.1@521.62,1326 ; v1(1753,161) 1720.99,128.99 C13.2 C14.2 ; C2.1 498,1103.99 1450.44,151.55 1450.44,149.58 1471.03,128.99 C14.2 ; C2.1 C2.1@521.62,1326 ; C2.1@521.62,1326 1046.62,1851 1302,1851
  Bottom Layer w15: v1(1753,161) 1753,346 v1(1663,436) 2122,436 2205,519 v1(2205,983) 2205,1278 v1(2513,1586)
+5: pad.2@632,2254 R3.2 U1.2 | length 2518.4
  Top Layer w15: pad.2@628,2249.11 U1.2 628.9,1925.9 1124.1,1925.9 v1(1125,1925) ; v1(2216,1411) 2286,1411 2413,1284 R3.2
  Bottom Layer w15: v1(1125,1925) 1799,1925 2216,1508 v1(2216,1411)
BUZZER: IC1.41
CURRENT_PAD: IC1.11
GND: C1.2 C2.2 C3.1 C4.1 C5.1 C6.1 C7.1 C8.1 C9.1 C10.1 C11.1 C12.1 C13.1 C14.1 C15.1 C16.2 D1.2 D2.2 IC1.12 IC1.18 IC1.31 IC1.47 IC1.63 J1.5 pad.2@750,2254 pad.8@3062,875 Q1.2 R5.2 R9.1 U2.1 U3.1 U3.11 U3.18 | length 313
  Top Layer w10: U3.1 U3.18 1578.87,498.32 1560.79,498.32 1532.53,470.06 U3.11
GYRO_AD0: U3.9
GYRO_AD1: IC1.22
GYRO_INT: IC1.24 U3.12 | length 965.8
  Top Layer w10: U3.12 1670.24,373.24 1758.16,461.16 IC1.24
GYRO_SCL: IC1.21 U3.23 | length 749.3
  Top Layer w10: U3.23 1473.47,826.47 1699.1,1052.1 IC1.21
GYRO_SDA: IC1.23 U3.24 | length 799.3
  Top Layer w10: v1(1423,616) 1423,569.39 1453.79,538.6 U3.24 ; v1(1513,791) 1738.47,1016.47 IC1.23
  Bottom Layer w10: v1(1423,616) 1423,701 v1(1513,791)
LED1: IC1.56 R10.2 | length 692.4
  Top Layer w10: IC1.56 1777.84,1655.58 1781.62,1659.36 1781.62,1661.68 1937.94,1818 2115,1818 2273,1976 R10.2@2318,1976
LED2: IC1.57 R11.2 | length 563.7
  Top Layer w10: IC1.57 1758.5,1637.72 1758.5,1664.02 1930.48,1836 2007.45,1836 2143,1971.55 R11.2@2168,1971.55
NetC1_1: C1.1 U1.3 U2.3 | length 516.3
  Top Layer w10: C1.1 498,1838.14 536.54,1876.68 536.54,1880.62 545.32,1889.4 U1.3
  Top Layer w15: U2.3 446.93,1563.55 474.38,1591 C1.1
NetC3_2: C3.2 C4.2 IC1.13 | length 294.5
  Top Layer w10: C4.2@1377.99,1146.5 C3.2 1377.99,1241.97 1458.44,1322.42 IC1.13 ; 1404.5,1156 1405.99,1157.5
NetC5_2: C5.2 IC1.30 | length 407.2
  Top Layer w10: IC1.30 1876.27,1143.73 1959,1061 1959,865 1971.77,852.23 2005.28,852.23 C5.2
NetC15_2: C15.2 U3.10 | length 115.3
  Top Layer w10: U3.10 1512.84,321.63 1556.5,277.97 C15.2
NetC16_1: C16.1 U3.20 | length 152.5
  Top Layer w10: U3.20 1534.42,530.65 1534.42,548.72 1589.13,603.44 1612.41,603.44 1633,624.03 C16.1
NetD1_1: D1.1 R10.1 | length 247.3
  Top Layer w10: R10.1 2333.9,2044.9 2350.32,2061.32 2350.32,2202.22 2404.13,2256.03 D1.1
NetD2_1: D2.1 R11.1 | length 236
  Top Layer w10: D2.1 2134.13,2256.03 2178.75,2211.42 R11.1
NetJ1_2: J1.2 R1.2 | length 299
  Top Layer w10: R1.2 2812.1,1421 2858.76,1467.65 J1.2@2976.58,1467.65
NetJ1_3: J1.3 R2.2 | length 265.2
  Top Layer w10: R2.2 2918.29,1511 2936.05,1493.24 J1.3
NetQ1_1: Q1.1 R4.2 | length 171
  Top Layer w10: Q1.1 2374.54,1009.03 2388.54,1009.03 2389.76,1010.25 2528.75,1010.25 R4.2
NetR1_1: IC1.44 R1.1 | length 660.3
  Top Layer w10: IC1.44 2573.04,1479.9 2628,1424.94 R1.1
NetR2_1: IC1.45 R2.1 | length 638.4
  Top Layer w10: IC1.45 2616.58,1499.58 R2.1
NetR5_1: IC1.60 R5.1 SW1.1 SW1.2 | length 624.5
  Top Layer w10: SW1.1 SW1.2 1632.77,2028.29 1653.06,2008 R5.1 1657,1844.02 1699.1,1801.92 IC1.60
NetR6_2: IC1.58 R6.2 | length 432.5
  Top Layer w10: IC1.58 1738.47,1681.47 1988,1931 R6.2
NetR7_2: IC1.59 R7.2 | length 382.7
  Top Layer w10: IC1.59 1718.79,1716.79 1848,1846 R7.2
NetR8_1: IC1.25 R8.1 R9.2 | length 704.5
  Top Layer w10: IC1.25 1777.84,775.17 1894.06,658.95 R9.2 2020.6,658.95 R8.1
NetY1_1: IC1.5 Y1.1 | length 461.2
  Top Layer w10: Y1.1 1272.32,1643.01 1435.43,1479.9 IC1.5
NetY1_2: IC1.6 Y1.2 | length 472.8
  Top Layer w10: Y1.2 1242.57,1268.99 1433.79,1460.21 IC1.6
PPM_IN: IC1.40
RSSI_PAD: IC1.10
S1: IC1.17 pad.3 | length 1627.3
  Top Layer w15: pad.3 61,1024 v1(226,1024) ; v1(1405,1065) 1524.62,1184.62 IC1.17
  Bottom Layer w15: v1(226,1024) 1364,1024 v1(1405,1065)
S2: IC1.26 pad.4 | length 2108.6
  Top Layer w10: pad.4 62,914 v1(229,914) ; IC1.26 1797.53,900.1 1824,873.62 v1(1824,870)
  Bottom Layer w10: v1(229,914) 273,870 v1(1824,870)
S3: IC1.27 pad.5 | length 2259.8
  Top Layer w10: pad.5 62,810 v1(222,810) ; IC1.27 1817.21,940.79 1903.72,854.28 1903.72,826.28 v1(1908,822)
  Bottom Layer w10: v1(222,810) 232.82,810 251.82,829 1689.89,829 1696.89,822 v1(1908,822)
S4: IC1.16 pad.6 | length 1890.8
  Top Layer w10: pad.6 314,692 418,796 v1(418,1082) ; v1(1459,1221) 1501.36,1263.36 IC1.16
  Bottom Layer w10: v1(418,1082) 424,1076 1314,1076 v1(1459,1221)
SBUS: pad.8@3062,1002 R4.1 | length 656.2
  Top Layer w10: v1(2558,908) 2606.9,956.9 R4.1 ; v1(2919.56,992.87) 3052.87,992.87 pad.8@3062,1002
  Bottom Layer w10: v1(2558,908) 2834.69,908 v1(2919.56,992.87)
SCL_PAD: R6.1
SDA_PAD: R7.1
UART1_RX: IC1.43 Q1.3 R3.1 | length 695.4
  Top Layer w10: IC1.43 2083.83,1460.21 2344.1,1199.94 R3.1 2344.1,1000.84 2369.69,975.25 Q1.3
UART1_TX: IC1.42
UART3_RX: IC1.33 pad.8@2343,110 | length 1369
  Top Layer w10: IC1.33 2104.64,1263.36 2278,1090 2278,769 v1(2335,712) ; v1(2327,291) 2327,126 pad.8@2343,110
  Bottom Layer w10: v1(2327,291) 2331,295 2331,708 v1(2335,712)
UART3_TX: IC1.29 pad.7 | length 1213.6
  Top Layer w10: IC1.29 1856.58,941.96 1946,852.54 1946,755 v1(1940,749) ; v1(2094,489) 2180,403 pad.7
  Bottom Layer w10: v1(1940,749) 1940,643 v1(2094,489)
UART6_RX: IC1.38
UART6_TX: IC1.37
VBAT_PAD: IC1.9
pads on no net: IC1.1 IC1.2 IC1.3 IC1.4 IC1.7 IC1.8 IC1.14 IC1.15 IC1.20 IC1.28 IC1.34 IC1.35 IC1.36 IC1.39 IC1.46 IC1.49 IC1.50 IC1.51 IC1.52 IC1.53 IC1.54 IC1.55 IC1.61 IC1.62 J1.4 J1.S U3.2 U3.3 U3.4 U3.5 U3.6 U3.7 U3.14 U3.15 U3.16 U3.17 U3.19 U3.21 U3.22

## Polygon pours and split planes (outlines as drawn)
GND on Top Layer "GND" (solid, pour order 3): 14.97,2448 -0.03,2433 -0.03,14.03 14,0 3127.97,0 3138,10.03 3138,2437 3126.99,2448
GND on Bottom Layer "GND_L02_P004" (solid, pour order 4): 3126.99,2448.02 15.02,2448.02 -0.01,2432.98 -0.01,14.02 14.02,-0.02 3127.98,-0.02 3138.02,10.01 3138.02,2436.98

## Silkscreen, mask and mechanical layers (free items; w line width, h text height)
Top Overlay:
  lines w10: 204,243 870,243 870,468 204,468 204,243
  text "GND" at 819,2228 h60
  text "5V" at 470,2223 h60
  text "SBUS" at 3087,1070 h60 r90
  text "S1" at 109,998 h51.18
  text "S2" at 109,882 h51.18
  text "S3" at 109,781 h51.18
  text "S4" at 109,666 h51.18
  text "GND" at 3089,636 h60 r90
  text "Burak Elber / Gonulbagi" at 189.05,255 h60
  text "Flight Controller Board 2022" at 213.87,109.37 h31.5
  text "RX3" at 2409,84 h60
  text "TX3" at 1954,81 h60